# Altium PCB STC12C5A60S2最小系统.PcbDoc
Units mil, origin at the board's own origin, x right, y up, seen from the top; angles counter-clockwise.
Board outline 6000 x 4000 mil, 2 copper layers (Top Layer, Bottom Layer); 29 components, 45 nets, 133 pads, 0 vias.
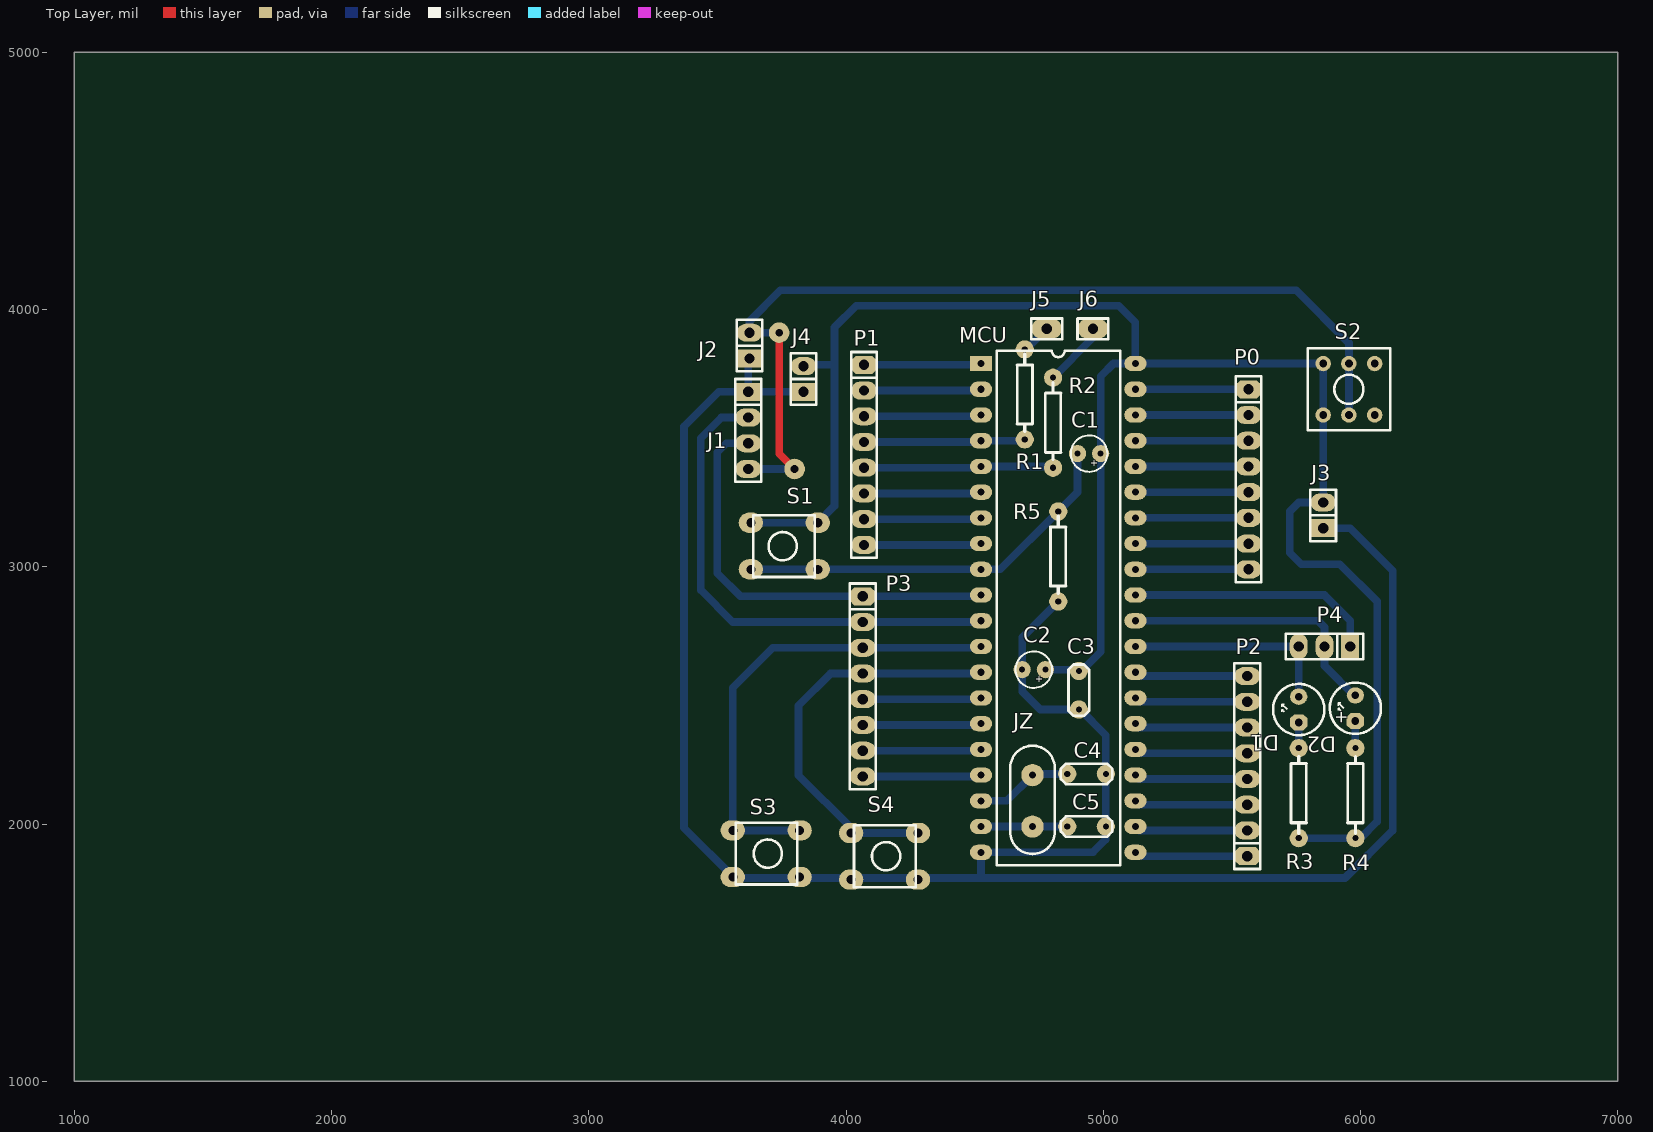
[diagram p0: Top Layer view]
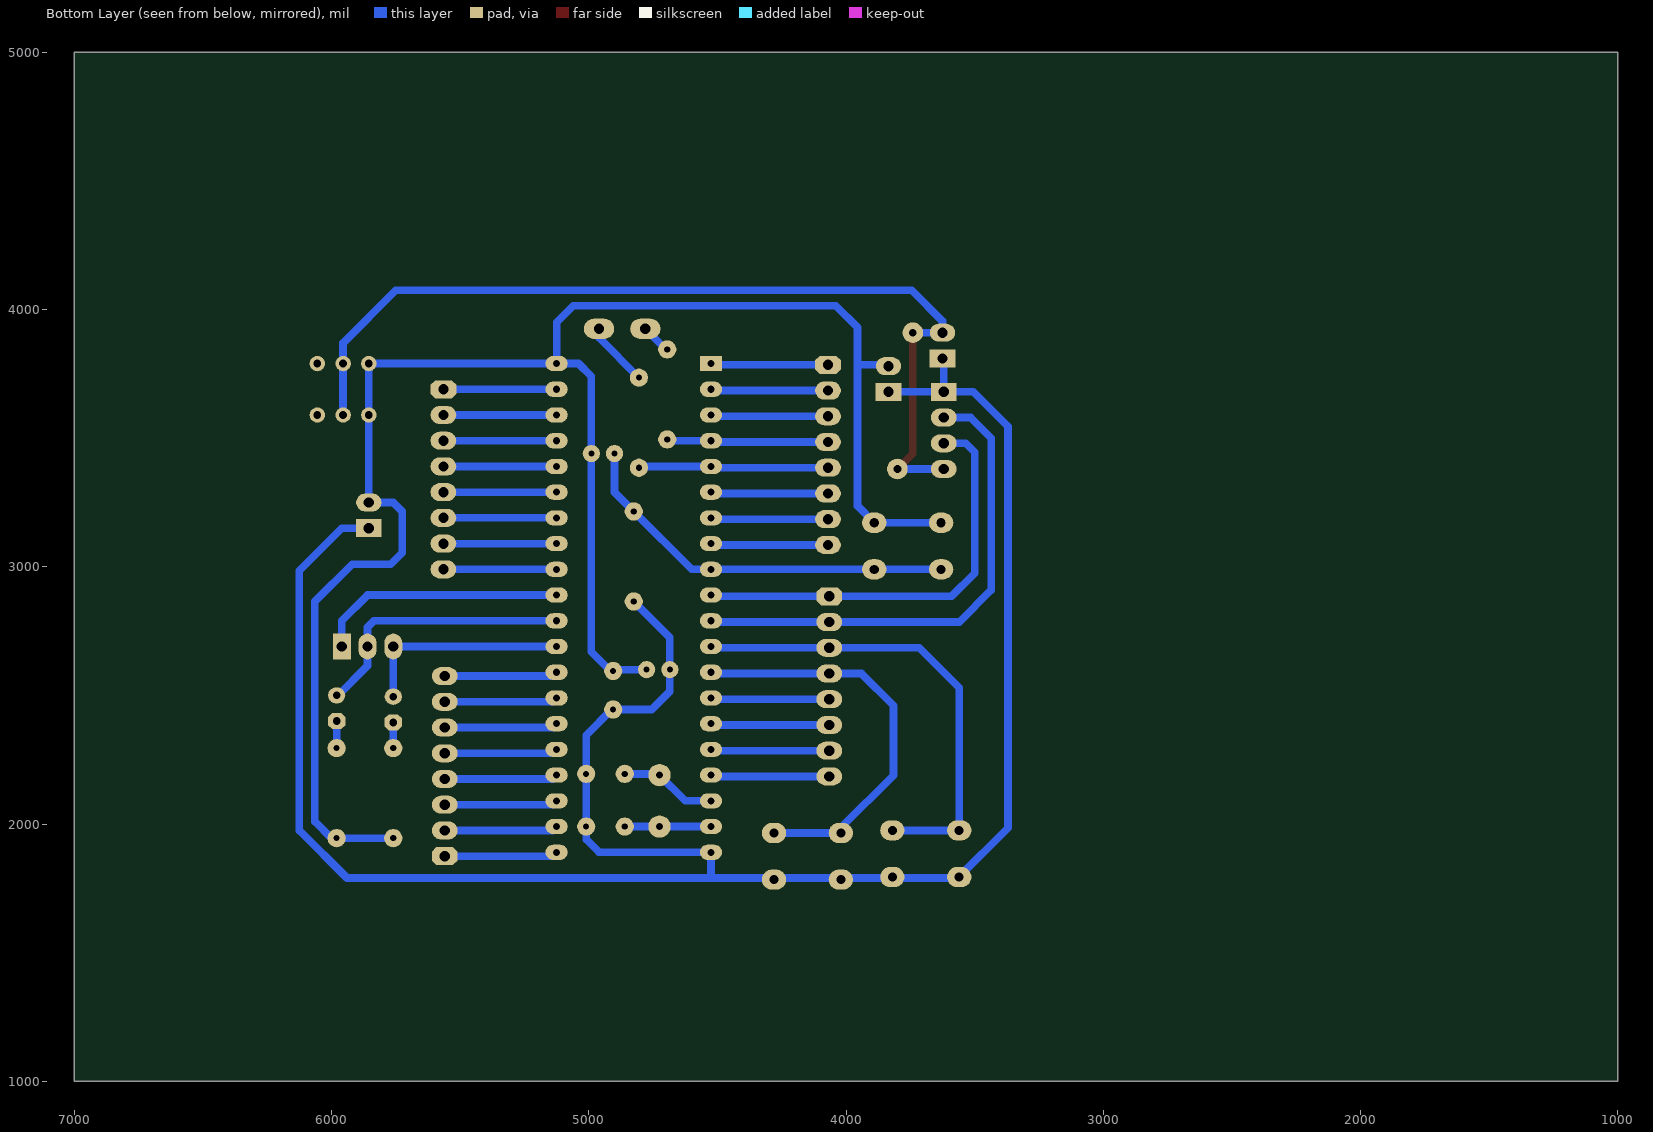
[diagram p1: Bottom Layer view, seen from below]

## Layer stack, top to bottom
Top Layer: signal copper 1.4
Dielectric: dielectric 12.6, FR-4, Dk 4.8
Bottom Layer: signal copper 1.4

## Board outline
1000,1000 7000,1000 7000,5000 1000,5000

## Design rules (kind name [scope] priority, off if disabled: settings)
Clearance [All] p1: gap=10
ComponentClearance [All] p1 off: gap=10 collisioncheckmode=3 verticalgap=10 showdistances=FALSE
PolygonConnect [All] p1: connectstyle=Relief reliefconductorwidth=10 reliefentries=4 polygonreliefangle="90 Angle" airgapwidth=10
RoutingVias [All] p1: holewidth=28 width=50 viastyle="Through Hole" minholewidth=28 minwidth=50 maxholewidth=28 maxwidth=50
SilkscreenOverComponentPads [All] p1: minsilkscreentomaskgap=10
SolderMaskExpansion [All] p1: expansion=4
Width [All] p1: maxlimit=100 minlimit=10 preferedwidth=40
26 further rules are at their usual default settings.

## Components (designator, comment, footprint, x,y, rotation, side; value= is the part's Value field where it differs from the comment)
C1 "10uF" CAO1 4945,3440 r180 top
C2 "47uF" CAO1 4730,2600 r180 top
C3 "104" CAP1 4905,2520 r270 top
C4 "30P" CAP1 4935,2195 r0 top
C5 "30P" CAP1 4935,1990 r0 top
D1 "LED" LED2 5760,2395 r90 top
D2 "LED" LED2 5980,2400 r90 top
J1 "CON4" sip-4 3620,3680 r270 top
J2 "CON2" sip-2 3625,3810 r90 top
J3 "CON2" sip-2 5855,3150 r90 top
J4 "CON2" sip-2 3835,3680 r90 top
J5 "CON1" SIP-1 4780,3925 r90 top
J6 "CON1" SIP-1 4960,3925 r90 top
JZ "12M" JZ1 4725,2090 r270 top
MCU "STC12C5A60S2" DIP-40 4525,3790 r0 top
P0 "CON8" sip-8 5565,3690 r270 top
P1 "CON8" sip-8 4070,3785 r270 top
P2 "CON8" sip-8 5560,1875 r90 top
P3 "CON8" sip-8 4065,2885 r270 top
P4 "CON3" sip-3 5960,2690 r180 top
R1 "RES" AXIAL0.3 4695,3495 r90 top
R2 "RES" AXIAL0.3 4805,3385 r90 top
R3 "1K" AXIAL0.3 5760,2295 r270 top
R4 "1K" AXIAL0.3 5980,2295 r270 top
R5 "10K" AXIAL0.3 4825,2865 r90 top
S1 "SW-PB" SW6*6 3890,2990 r180 top
S2 "SW-DPDT" SW3 5895,3930 r180 top
S3 "SW-PB" SW6*6 3560,1975 r0 top
S4 "SW-PB" SW6*6 4020,1965 r0 top

## Footprints (in the part's own frame and the unit in brackets; to place one, negate y for a bottom-side part, rotate by r counter-clockwise, add the part's x,y. Pads: shape width x height; smd on the part's side, far side on the other; paste and mask are expansions set on the pad)
AXIAL0.3 [mm]
  round 1.8 hole 0.6: 1(0,0) 2(8.89,0)
  silkscreen extent 0.81,-0.76 8.43,0.76
CAO1 [mm]
  round 1.7 hole 0.6: 1(-1.143,0) 2(1.143,0)
  silkscreen extent -1.8,-1.8 1.8,1.8
CAP1 [mm]
  round 1.8 hole 0.6: 1(-1.905,0) 2(1.905,0)
  silkscreen extent -2.54,-1.02 2.54,1.02
DIP-40 [mm]
  rect 2.2x1.5 hole 0.7: 1(0,0)
  oval 2.2x1.5 hole 0.7: 2(0,-2.54) 3(0,-5.08) 4(0,-7.62) 5(0,-10.16) 6(0,-12.7) 7(0,-15.24) 8(0,-17.78) 9(0,-20.32) 10(0,-22.86) 11(0,-25.4) 12(0,-27.94) 13(0,-30.48) 14(0,-33.02) 15(0,-35.56) 16(0,-38.1) 17(0,-40.64) 18(0,-43.18) 19(0,-45.72) 20(0,-48.26) 21(15.24,-48.26) 22(15.24,-45.72) 23(15.24,-43.18) 24(15.24,-40.64) 25(15.24,-38.1) 26(15.24,-35.56) 27(15.24,-33.02) 28(15.24,-30.48) 29(15.24,-27.94) 30(15.24,-25.4) 31(15.24,-22.86) 32(15.24,-20.32) 33(15.24,-17.78) 34(15.24,-15.24) 35(15.24,-12.7) 36(15.24,-10.16) 37(15.24,-7.62) 38(15.24,-5.08) 39(15.24,-2.54) 40(15.24,0)
  silkscreen extent 1.55,-49.53 13.74,1.27
JZ1 [mm]
  round 2.2 hole 0.7: 1(-2.54,0) 2(2.54,0)
  silkscreen extent -5.45,-2.2 5.25,2.2
LED2 [mm]
  oct 1.6x1.7 hole 0.762: 1(0,0)
  oval 1.6x1.7 hole 0.762: 2(2.54,0)
  silkscreen extent -1.26,-2.53 3.8,2.53
SIP-1 [mm]
  oval 2x3 hole 1.016: 1(0,0)
  silkscreen extent -1.02,-1.52 1.02,1.52
sip-2 [mil]
  rect 70x100 hole 40: 1(0,0)
  oval 70x98.42 hole 40: 2(100,0)
  silkscreen extent -50,-50 150,50
sip-3 [mil]
  rect 70x100 hole 40: 1(0,0)
  oval 70x100 hole 40: 2(100,0) 3(200,0)
  silkscreen extent -50,-50 250,50
sip-4 [mil]
  rect 70x100 hole 40: 1(0,0)
  oval 70x100 hole 40: 2(100,0) 3(200,0) 4(300,0)
  silkscreen extent -50,-50 350,50
sip-8 [mil]
  oct 70x100 hole 40: 1(0,0)
  oval 70x100 hole 40: 2(100,0) 3(200,0) 4(300,0) 5(400,0) 6(500,0) 7(600,0) 8(700,0)
  silkscreen extent -50,-50 750,50
SW3 [mil]
  round 60 hole 30: 0(-160,340) 1(40,340) 2(-60,340) 3(-160,140) 4(40,140) 5(-60,140)
  silkscreen extent -220,80 100,400
SW6*6 [mm]
  oval 2.4x2 hole 0.9: 1(0,0) 1(6.6,0) 2(0,-4.6) 2(6.6,-4.6)
  silkscreen extent 0.28,-5.34 6.38,0.76

## Part data
J1 J2 J3 J4 J5 J6 P0 P1 P2 P3 P4: "Co"
JZ: library part CRY1, "6.0000 8.000  11.0592  12.0000"
MCU: library part STC12C

## Free pads (board coordinates)
  round 80 hole 30: 0(3740,3910) 1(3800,3380)

## Nets (pads, with @x,y where several pads share a name; then routed paths per layer and width w, separated by ;. In a path a pad name is that pad's centre, name@x,y a point inside that pad or via, vN(x,y) a via of type N, cw(c..) or ccw(c..) an arc to the next point about the centre after c; other vN are vias at no path point)
+5V: C1.1 C2.1 C3.1 J3.2 J4.2 MCU.40 R3.2 R4.2 S1.2 S2.1 S2.4 | length 7345.8
  Bottom Layer w30: S1.2@3630.16,3171.1 S1.2@3890,3171.1 ; J4.2@3840,3780 3840,3785 3955,3785 ; S1.2@3890,3165 S1.2@3890,3171.1 ; C3.1 4900,2600 C2.1 4920,2600 4990,2670 4990,3740 5040,3790 MCU.40 ; R3.2 R4.2 6000,1945 6065,2010 6065,2865 5920,3010 5770,3010 5725,3055 5725,3215 5760,3250 J3.2 S2.1 S2.4 MCU.40 ; S1.2@3890,3171.1 3955,3236.1 3955,3785 ; 3955,3785 3955,3930 4040,4015 5060,4015 5125,3950 MCU.40
GND: C2.2 C3.2 C4.2 C5.2 J1.1 J2.1 J3.1 J4.1 MCU.20 R5.1 S3.2 S4.2 | length 8284.9
  Bottom Layer w30: J2.1 3620,3805 J1.1 ; J4.1 J1.1 ; 4525,1790 3565,1790 3370,1985 3370,3545 3505,3680 J1.1 ; R5.1 4685,2725 C2.2 4685,2515 4755,2445 C3.2 4910,2445 5010,2345 C4.2 C5.2 5010,1940 4960,1890 MCU.20 4525,1795 4530,1790 5940,1790 6125,1975 6125,2985 5960,3150 J3.1
"MCU RXD": J1.3 MCU.10 P3.1 | length 1668.8
  Bottom Layer w30: J1.3 3535,3480 3500,3445 3500,2975 3590,2885 P3.1 4520,2885 MCU.10
"MCU TXD": J1.2 MCU.11 P3.2 | length 1952
  Bottom Layer w30: J1.2 3515,3580 3435,3500 3435,2910 3560,2785 P3.2 4520,2785 MCU.11
NetD1_1: D1.1 R3.1 | length 100
  Bottom Layer w30: R3.1 D1.1
NetD2_1: D2.1 R4.1 | length 105
  Bottom Layer w30: R4.1 D2.1
P00: MCU.39 P0.1 | length 435
  Bottom Layer w30: MCU.39@5130,3690 P0.1
P01: MCU.38 P0.2 | length 440
  Bottom Layer w30: MCU.38 P0.2
P02: MCU.37 P0.3 | length 440
  Bottom Layer w30: MCU.37 P0.3
P03: MCU.36 P0.4 | length 440
  Bottom Layer w30: MCU.36 P0.4
P04: MCU.35 P0.5 | length 440
  Bottom Layer w30: MCU.35 P0.5
P05: MCU.34 P0.6 | length 440
  Bottom Layer w30: MCU.34 P0.6
P06: MCU.33 P0.7 | length 440
  Bottom Layer w30: MCU.33 P0.7
P07: MCU.32 P0.8 | length 440
  Bottom Layer w30: MCU.32 P0.8
P10: MCU.1 P1.1 | length 457.1
  Bottom Layer w30: P1.1 4520,3785 MCU.1
P11: MCU.2 P1.2 | length 457.1
  Bottom Layer w30: P1.2 4520,3685 MCU.2
P12: MCU.3 P1.3 | length 457.1
  Bottom Layer w30: P1.3 4520,3585 MCU.3
P13: MCU.4 P1.4 R1.1 | length 629.1
  Bottom Layer w30: P1.4 4520,3485 MCU.4 4690,3490 R1.1
P14: MCU.5 P1.5 R2.1 | length 739.1
  Bottom Layer w30: P1.5 4520,3385 MCU.5 4800,3390 R2.1
P15: MCU.6 P1.6 | length 457.1
  Bottom Layer w30: P1.6 4520,3285 MCU.6
P16: MCU.7 P1.7 | length 457.1
  Bottom Layer w30: P1.7 4520,3185 MCU.7
P17: MCU.8 P1.8 | length 457.1
  Bottom Layer w30: P1.8 4520,3085 MCU.8
P20: MCU.21 P2.1 | length 441.2
  Bottom Layer w30: MCU.21 5140,1875 P2.1
P21: MCU.22 P2.2 | length 441.2
  Bottom Layer w30: MCU.22 5140,1975 P2.2
P22: MCU.23 P2.3 | length 441.2
  Bottom Layer w30: MCU.23 5140,2075 P2.3
P23: MCU.24 P2.4 | length 441.2
  Bottom Layer w30: MCU.24 5140,2175 P2.4
P24: MCU.25 P2.5 | length 441.2
  Bottom Layer w30: MCU.25 5140,2275 P2.5
P25: MCU.26 P2.6 | length 441.2
  Bottom Layer w30: MCU.26 5140,2375 P2.6
P26: MCU.27 P2.7 | length 441.2
  Bottom Layer w30: MCU.27 5140,2475 P2.7
P27: MCU.28 P2.8 | length 441.2
  Bottom Layer w30: MCU.28 5140,2575 P2.8
P32: MCU.12 P3.3 S3.1 | length 1846.1
  Bottom Layer w30: S3.1@3819.84,1975 3560,1975 3560,2530 3715,2685 P3.3 4520,2685 MCU.12
P33: MCU.13 P3.4 S4.1 | length 1603.6
  Bottom Layer w30: S4.1@4279.84,1965 4020,1965 4020,1985 3815,2190 3815,2460 3940,2585 P3.4 4520,2585 MCU.13
P34: MCU.14 P3.5 | length 462.1
  Bottom Layer w30: P3.5 4520,2485 MCU.14
P35: MCU.15 P3.6 | length 462.1
  Bottom Layer w30: P3.6 4520,2385 MCU.15
P36: MCU.16 P3.7 | length 462.1
  Bottom Layer w30: P3.7 4520,2285 MCU.16
P37: MCU.17 P3.8 | length 462.1
  Bottom Layer w30: P3.8 4520,2185 MCU.17
P44: D1.2 MCU.29 P4.3 | length 825
  Bottom Layer w30: MCU.29 P4.3 D1.2@5760,2500
P45: D2.2 MCU.30 P4.2 | length 1065.1
  Bottom Layer w30: MCU.30 5835,2790 5860,2765 P4.2 5860,2615 D2.2@5980,2495
P46: MCU.31 P4.1 | length 976.4
  Bottom Layer w30: MCU.31 5860,2890 5960,2790 P4.1
PWM0: J5.1 R1.2 | length 113.1
  Bottom Layer w30: R1.2@4700,3845 J5.1
PWM1: J6.1 R2.2 | length 254.2
  Bottom Layer w30: R2.2 4960,3890 J6.1
RST: C1.2 MCU.9 R5.2 S1.1 | length 1556.3
  Bottom Layer w30: S1.1@3620,2985 3625,2990 3630.16,2990 3890,2990 MCU.9 4600,2990 R5.2 4900,3290 C1.2
VCC: J1.4 J2.2 pad.0 pad.1 S2.2 S2.5 | length 3627.4
  Top Layer w30: pad.0 3740,3440 pad.1@3795,3385
  Bottom Layer w30: J1.4 pad.1 ; J2.2 3625,3955 3745,4075 5750,4075 5955,3870 S2.5 S2.2 ; J2.2@3630,3910 pad.0
X1: C5.1 JZ.2 MCU.19 | length 295
  Bottom Layer w30: MCU.19 JZ.2@4685,1990 ; JZ.2 C5.1
X2: C4.1 JZ.1 MCU.18 | length 378.5
  Bottom Layer w30: MCU.18 4625,2090 JZ.1 4729,2194 4859,2194 C4.1
pads on no net: S2.0 S2.3

## Text inside footprints (layer, text, board x,y; h text height)
C1: Top Overlay "+" at 4981.42,3413.43 h27.56 r180
C2: Top Overlay "+" at 4766.42,2573.43 h27.56 r180
D2: Top Overlay "+" at 5947,2388 h47.24 r90